# Altium PCB VGA2NTSC v11.PcbDoc
Units mil, origin at the board's own origin, x right, y up, seen from the top; angles counter-clockwise.
Board outline 2300 x 4000 mil, 2 copper layers (Top Layer, Bottom Layer), stack 62.8 mil thick; 49 components, 41 nets, 184 pads, 29 vias.
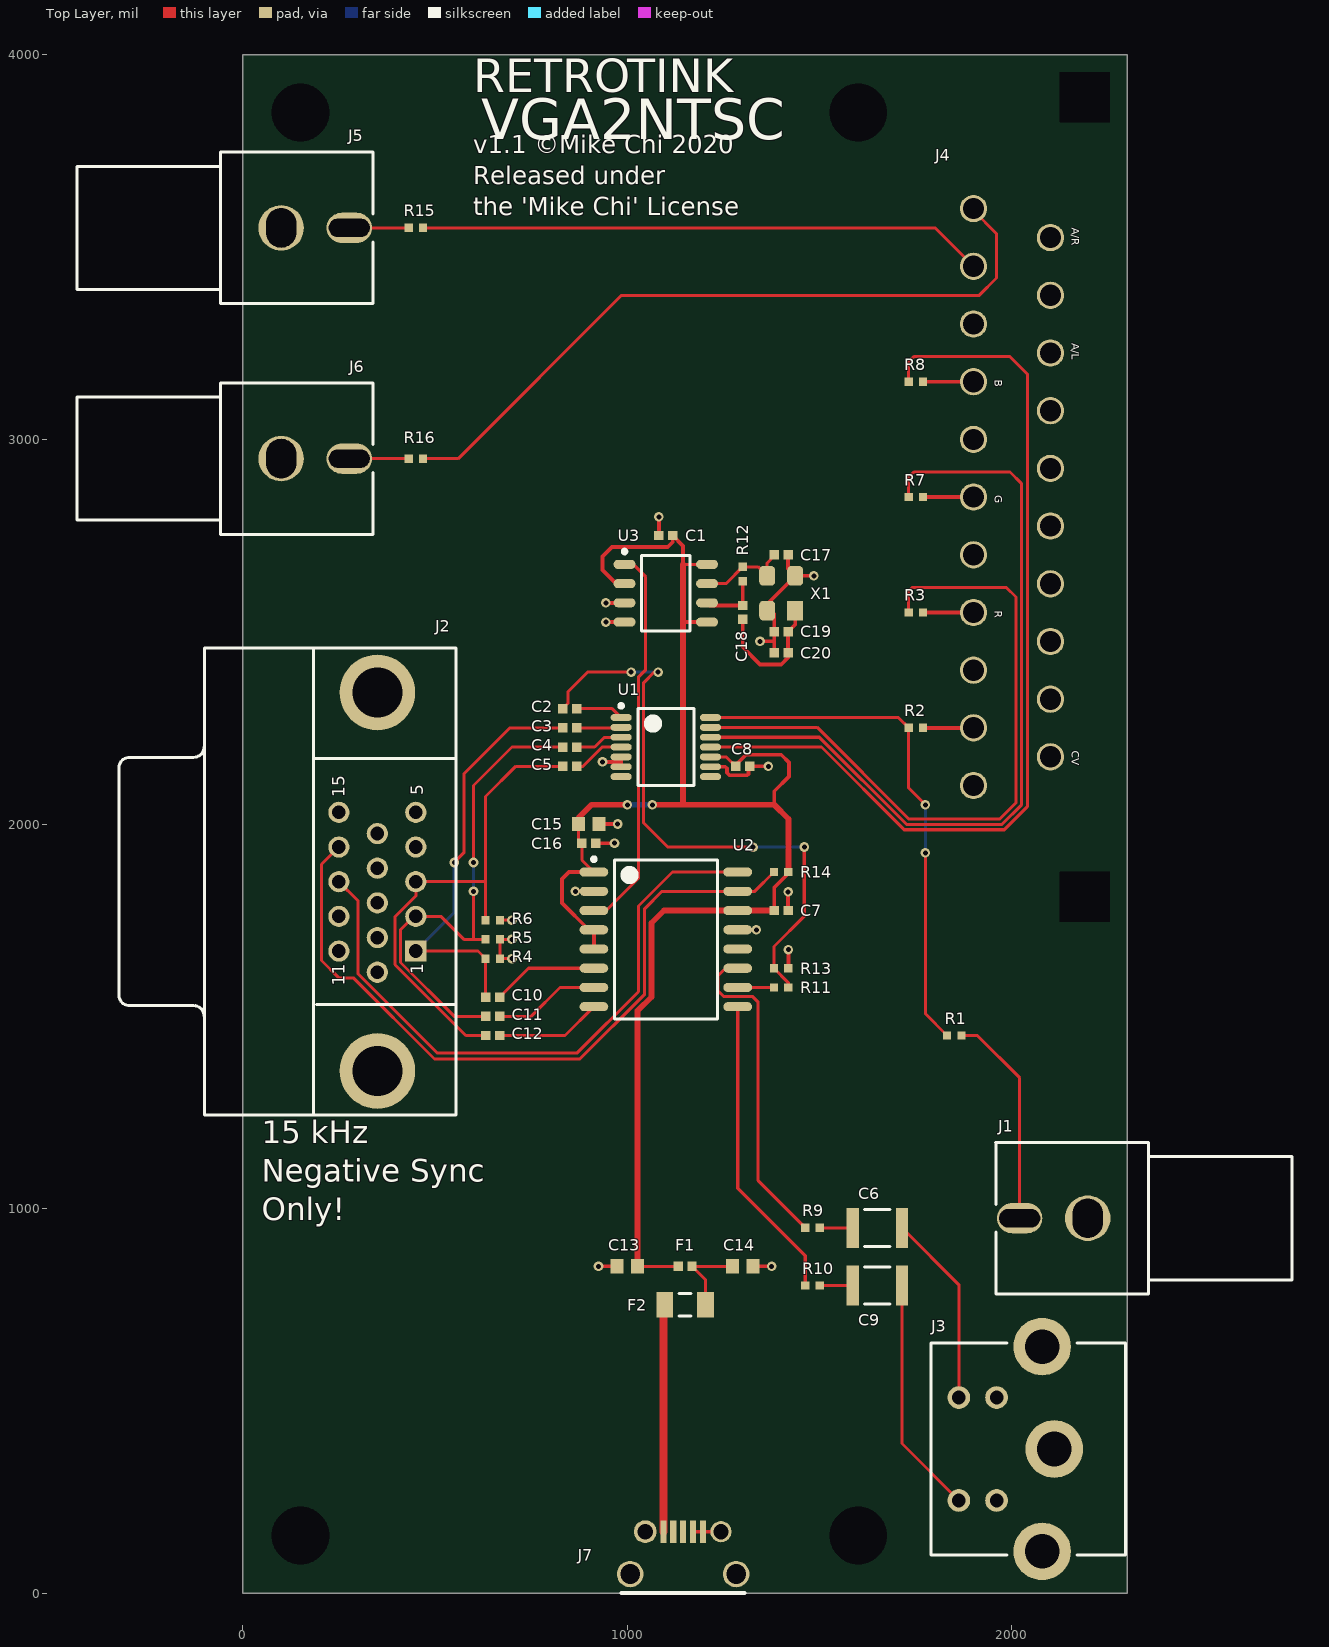
[diagram p0: Top Layer view]
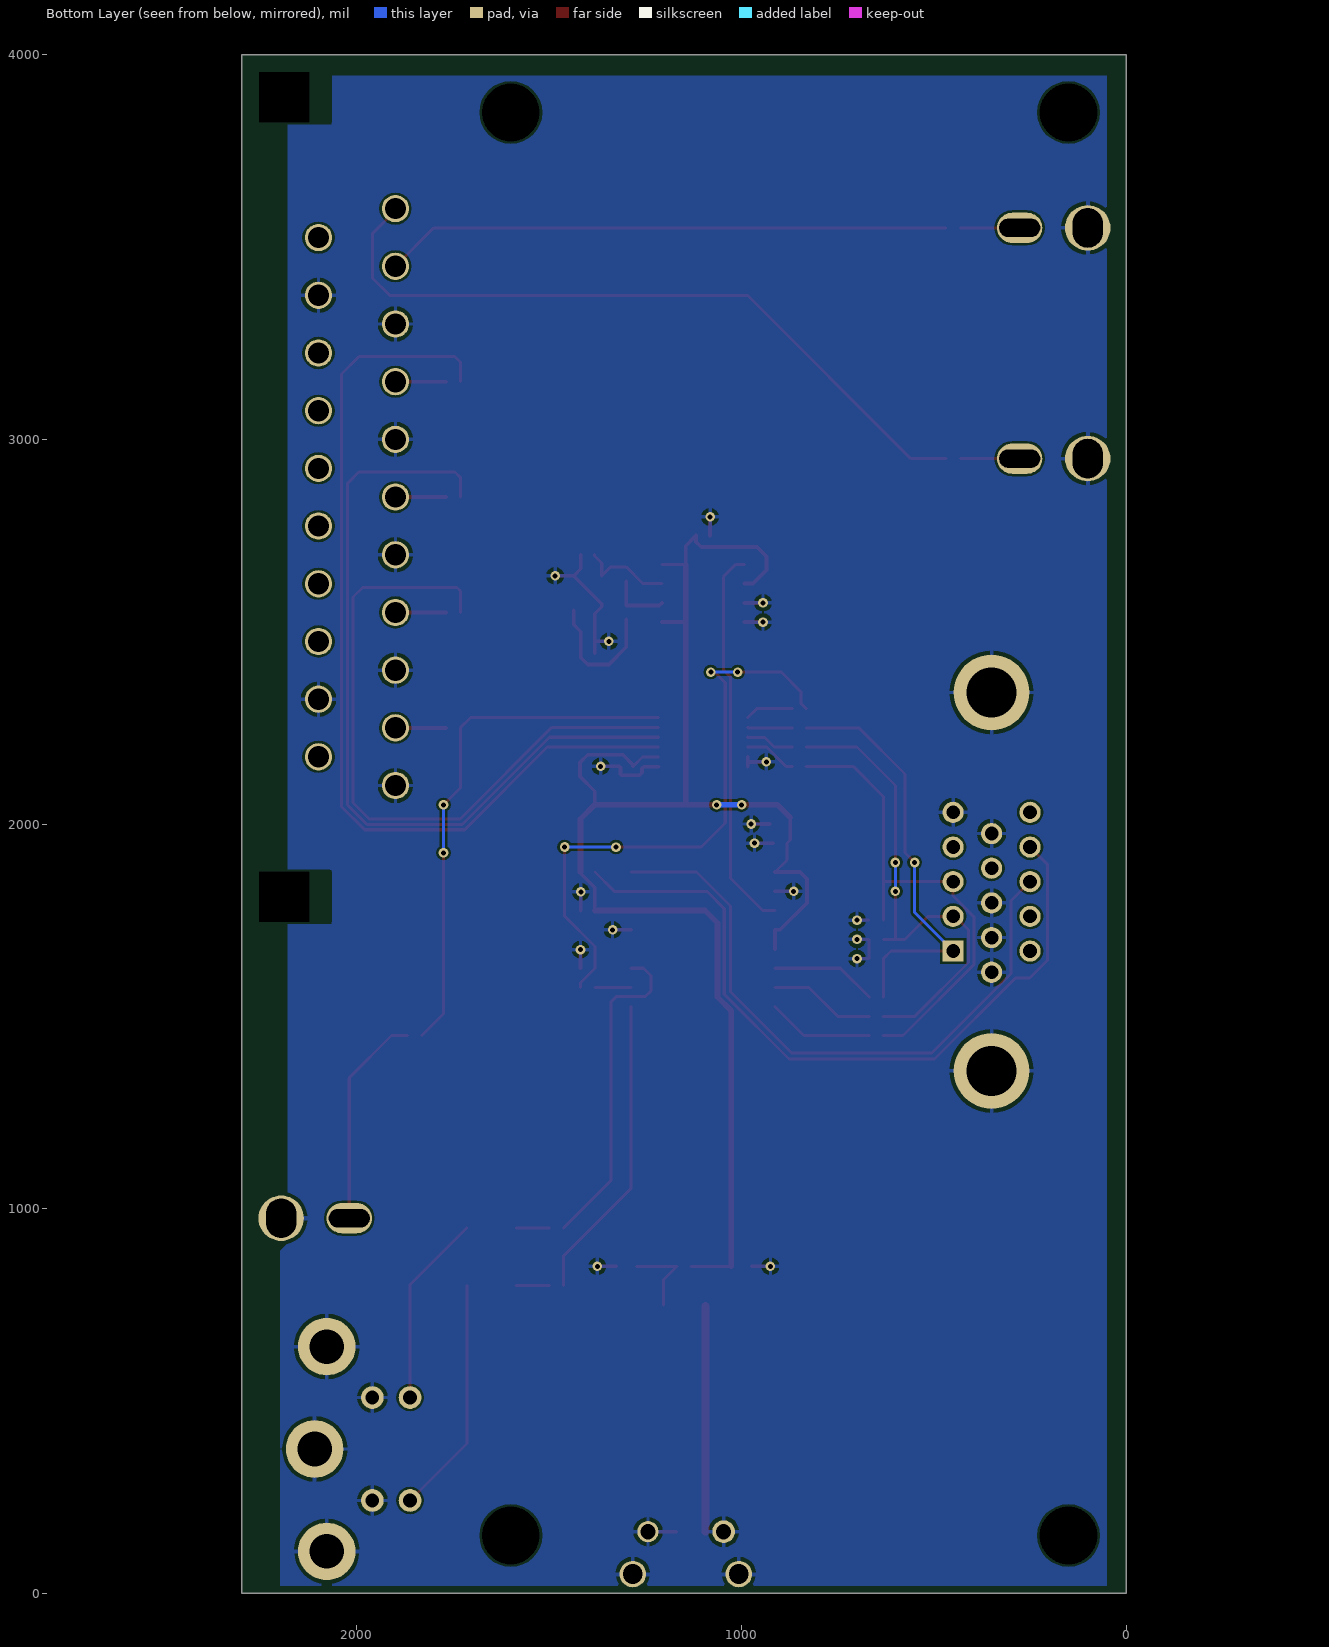
[diagram p1: Bottom Layer view, seen from below]
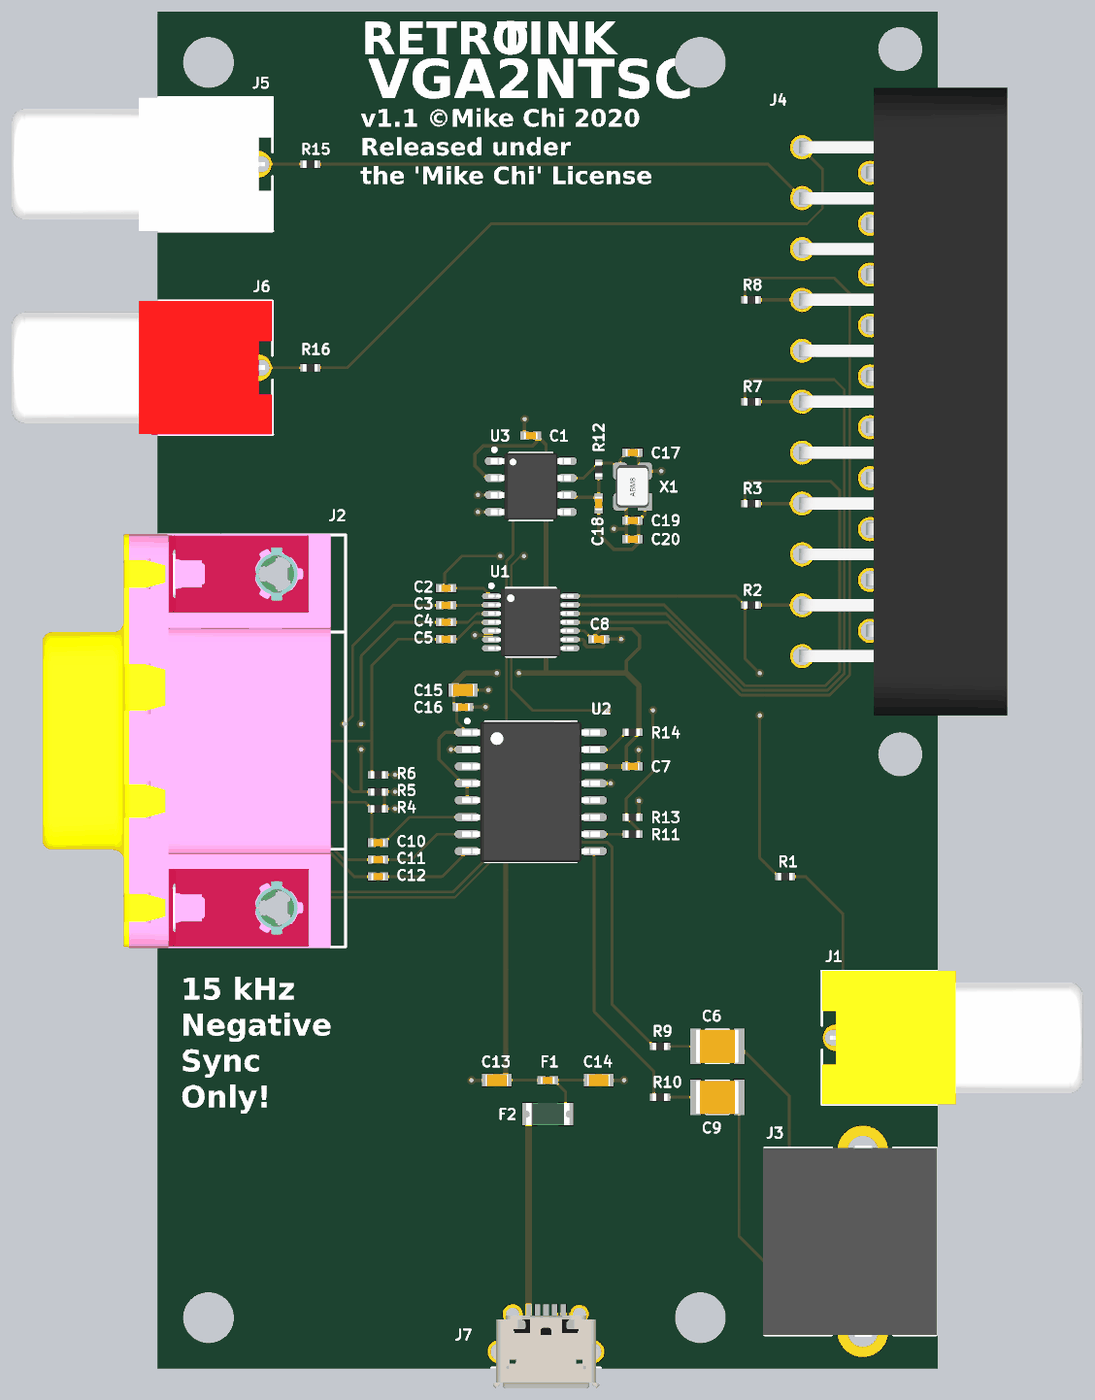
[diagram p2: 3D render of the assembled board from above, using the file's embedded part models]

## Layer stack, top to bottom
Top Solder: solder mask 0.4, Solder Resist, Dk 3.5
Top Layer: signal copper 1.4
Dielectric 1: dielectric 60, FR-4, Dk 4.8
Bottom Layer: signal copper 1.4
Bottom Solder: solder mask 0.4, Solder Resist, Dk 3.5

## Board outline
0,0 0,4000 2300,4000 2300,0

## Design rules (kind name [scope] priority, off if disabled: settings)
Clearance [All] p1: gap=6 ignorepadtopadclearanceinfootprint=FALSE
PlaneClearance [All] p1: clearance=15
PlaneConnect [All] p1: planeconnectstyle=Relief reliefexpansion=10 reliefentries=4 reliefconductorwidth=10 reliefairgap=6
PolygonConnect [All] p1: connectstyle=Relief reliefconductorwidth=10 reliefentries=4 polygonreliefangle="90 Angle" airgapwidth=10
RoutingVias [All] p1: holewidth=13 width=25 viastyle="Through Hole" minholewidth=13 minwidth=25 maxholewidth=13 maxwidth=25
SolderMaskExpansion [All] p1: expansion=2
Width [All] p1: maxlimit=20 minlimit=6 preferedwidth=6
28 further rules are at their usual default settings.

## Components (designator, comment, footprint, x,y, rotation, side; value= is the part's Value field where it differs from the comment)
C1 "Cap 0.1uF 0402" CAPC1005X05N 1100,2750 r0 top value=0.1uF
C2 "Cap 0.1uF 0402" CAPC1005X05N 850,2300 r0 top value=0.1uF
C3 "Cap 0.1uF 0402" CAPC1005X05N 850,2250 r0 top value=0.1uF
C4 "Cap 0.1uF 0402" CAPC1005X05N 850,2200 r0 top value=0.1uF
C5 "Cap 0.1uF 0402" CAPC1005X05N 850,2150 r0 top value=0.1uF
C6 "Cap 100uF 1210" CAPC3225X25N 1650,950 r0 top value=100uF
C7 "Cap 0.1uF 0402" CAPC1005X05N 1400,1775 r180 top value=0.1uF
C8 "Cap 0.1uF 0402" CAPC1005X05N 1300,2150 r180 top value=0.1uF
C9 "Cap 100uF 1210" CAPC3225X25N 1650,800 r0 top value=100uF
C10 "Cap 0.1uF 0402" CAPC1005X05N 650,1550 r0 top value=0.1uF
C11 "Cap 0.1uF 0402" CAPC1005X05N 650,1500 r0 top value=0.1uF
C12 "Cap 0.1uF 0402" CAPC1005X05N 650,1450 r0 top value=0.1uF
C13 "Cap 10uF 0603" CAPC1608X09N 1000,850 r180 top value=10uF
C14 "Cap 10uF 0603" CAPC1608X09N 1300,850 r0 top value=10uF
C15 "Cap 10uF 0603" CAPC1608X09N 900,2000 r0 top value=10uF
C16 "Cap 0.1uF 0402" CAPC1005X05N 900,1950 r180 top value=0.1uF
C17 "Cap 18pF 0402" CAPC1005X05N 1400,2700 r180 top value=18pF
C18 "Cap 47pF 0402" CAPC1005X05N 1300,2550 r270 top value=47pF
C19 "Cap 47pF 0402" CAPC1005X05N 1400,2500 r0 top value=47pF
C20 "Cap 47pF 0402" CAPC1005X05N 1400,2445 r0 top value=47pF
F1 "Ferrite Bead" CAPC1005X05N 1150,850 r0 top
F2 "PTC 500mA" PTC1206 1150,750 r180 top
J1 "RCA Yellow" RCJ-044 2197.01,975 r0 top
J2 "DB-15 VGA" "DB-15 VGA" 350,1850 r90 top
J3 "MD-40SM" CDIN2.6-3H4A 2295.04,375 r180 top
J4 "SCART Female" "SCART FEMALE" 1900,2850 r270 top
J5 "RCA White" RCJ-043 100,3550 r180 top
J6 "RCA Red" RCJ-042 100,2950 r180 top
J7 "Micro USB" MICROUSB 1145,189.53 r90 top
R1 "Res 75 0402" RESC1005X03N 1850,1450 r0 top value=75
R2 "Res 75 0402" RESC1005X03N 1750,2250 r0 top value=75
R3 "Res 75 0402" RESC1005X03N 1750,2550 r0 top value=75
R4 "Res 75 0402" RESC1005X03N 650,1650 r0 top value=75
R5 "Res 75 0402" RESC1005X03N 650,1700 r0 top value=75
R6 "Res 75 0402" RESC1005X03N 650,1750 r0 top value=75
R7 "Res 75 0402" RESC1005X03N 1750,2850 r0 top value=75
R8 "Res 75 0402" RESC1005X03N 1750,3150 r0 top value=75
R9 "Res 75 0402" RESC1005X03N 1481.3,950 r0 top value=75
R10 "Res 75 0402" RESC1005X03N 1481.3,800 r0 top value=75
R11 "Res 1k 0402" RESC1005X03N 1400,1575 r0 top value=1k
R12 "Res 1M 0402" RESC1005X03N 1300,2650 r270 top value=1M
R13 "Res 1k 0402" RESC1005X03N 1400,1625 r0 top value=1k
R14 "Res 4.7k" RESC1005X03N 1400,1875 r180 top value=4.7k
R15 "Res 49.9 0402" RESC1005X03N 450,3550 r180 top value=49.9
R16 "Res 49.9 0402" RESC1005X03N 450,2950 r180 top value=49.9
U1 "Video Buffer" TSOP65P640X120-14N 1100,2200 r0 top
U2 "Encoder" SOIC127P1030X237-16N 1100,1700 r0 top
U3 "OSC/DIV" SOIC127P600X175_HS-8N 1100,2600 r0 top
X1 "XTAL" ABM8-28.63636MHZ-B2-T 1400,2600 r90 top

## Footprints (in the part's own frame and the unit in brackets; to place one, negate y for a bottom-side part, rotate by r counter-clockwise, add the part's x,y. Pads: shape width x height; smd on the part's side, far side on the other; paste and mask are expansions set on the pad)
ABM8-28.63636MHZ-B2-T [mm] "ABM8-28.63636MHZ-B2-T"
  rect 1.3x1.05 smd: 1(-1.15,-0.925)
  rrect50% 1.3x1.05 smd: 2(1.15,-0.925) 3(1.15,0.925) 4(-1.15,0.925)
  body extent -1.6,-1.24 1.6,1.24, height 0.8
CAPC1005X05N [mm] "Chip Capacitor, 2-Leads, Body 1.00x0.50mm, IPC Medium Density"
  rect 0.62x0.62 smd: 1(-0.46,0) 2(0.46,0)
  body extent -0.53,-0.28 0.53,0.28, height 0.5
CAPC1608X09N [mm] "Chip Capacitor, 2-Leads, Body 1.60x0.80mm, IPC Medium Density"
  rect 0.85x0.95 smd: 1(-0.675,0) 2(0.675,0)
  body extent -0.85,-0.45 0.85,0.45, height 0.9
CAPC3225X25N [mm] "Chip Capacitor, 2-Leads, Body 3.20x2.50mm, IPC Medium Density"
  rect 0.8x2.65 smd: 1(-1.625,0) 2(1.625,0)
  silkscreen extent -0.85,-1.22 0.85,1.23, body extent -1.6,-1.25 1.6,1.25, height 2.5
CDIN2.6-3H4A [mm] "Connector; Circular DIN, Thru-Hole; 4 Position; Right Angle; Pitch 2.1/2.6 mm; Body 14 x 12.84 x 13 mm (WxTxH), Shielded, Special PCB Retention"
  round 1.5 hole 0.9: 1(8.51,-3.4) 2(8.51,3.4) 3(11,-3.4) 4(11,3.4)
  round 3.8 hole 2.28: MH1(5.5,-6.76) MH2(4.7,0) MH3(5.5,6.76)
  silkscreen extent 0,-7 12.84,7, body extent -0.05,-7.17 12.95,7.17, height 12.8
"DB-15 VGA" [mm]
  rect 1.4x1.4 hole 0.9: 1(-4.58,-2.54)
  round 1.4 hole 0.9: 2(-2.29,-2.54) 3(0,-2.54) 4(2.29,-2.54) 5(4.58,-2.54) 6(-5.98,0) 7(-3.69,0) 8(-1.4,0) 9(0.89,0) 10(3.18,0) 11(-4.58,2.54) 12(-2.29,2.54) 13(0,2.54) 14(2.29,2.54) 15(4.58,2.54)
  round 5 hole 3.3: 16(-12.495,0) 17(12.495,0)
  silkscreen extent -15.41,-5.19 15.43,17.07, body extent -15.5,-4.06 15.5,17.52, height 12.55
MICROUSB [mm]
  rect 1.5x0.4 smd: 1(-0.75,1.3) 2(-0.75,0.65) 3(-0.75,0) 4(-0.75,-0.65) 5(-0.75,-1.3)
  round 1.5 hole 1: 6(-0.75,2.5)
  round 1.4 hole 1: 7(-0.75,-2.5)
  round 1.75 hole 1.3: 8(-3.55,3.5) 9(-3.55,-3.5)
  silkscreen extent -4.8,-4.06 -4.8,4.06, body extent -6.28,-3.99 -0.85,3.99, height 2.73
PTC1206 [mm] "1206 PTC Fuse"
  rect 1.1x1.7 smd: 1(-1.35,0) 2(1.35,0)
  silkscreen extent -0.4,-0.75 0.4,0.75, body extent -1.63,-0.82 1.63,0.82, height 0.82
RCJ-042 [mm] "RCA Red"
  round 3 hole 2 slot 2.6 at 90 deg: 1A(0,0)
  oval 3x2 hole 1.2 slot 2.7 at 0 deg: 2B(-4.496,0)
  silkscreen extent -6.07,-5 13.5,5, body extent -6.04,-5 13.46,5, height 11.5
RCJ-043 [mm] "RCA White"
  round 3 hole 2 slot 2.6 at 90 deg: 1A(0,0)
  oval 3x2 hole 1.2 slot 2.7 at 0 deg: 2B(-4.496,0)
  silkscreen extent -6.07,-5 13.5,5, body extent -6.04,-5 13.46,5, height 11.5
RCJ-044 [mm] "RCA Yellow"
  round 3 hole 2 slot 2.6 at 90 deg: 1A(0,0)
  oval 3x2 hole 1.2 slot 2.7 at 0 deg: 2B(-4.496,0)
  silkscreen extent -6.07,-5 13.5,5, body extent -6.04,-5 13.46,5, height 11.5
RESC1005X03N [mm] "Chip Resistor, 2-Leads, Body 1.00x0.50mm, IPC Medium Density"
  rect 0.55x0.55 smd: 1(-0.475,0) 2(0.475,0)
  body extent -0.55,-0.28 0.55,0.28, height 0.35
"SCART FEMALE" [mm]
  round 1.8 hole 1.4: 1(-19.05,0) 2(-17.135,5.08) 3(-15.24,0) 4(-13.325,5.08) 5(-11.43,0) 6(-9.515,5.08) 7(-7.62,0) 8(-5.705,5.08) 9(-3.81,0) 10(-1.895,5.08) 11(0,0) 12(1.915,5.08) 13(3.81,0) 14(5.725,5.08) 15(7.62,0) 16(9.535,5.08) 17(11.43,0) 18(13.345,5.08) 19(15.24,0) 20(17.155,5.08) 21(19.05,0)
  round 0 hole 3.3 square unplated: ""(-26.4,7.35) ""(26.4,7.35)
  body extent -23.5,-0.25 23.5,15.35, height 16.75
SOIC127P600X175_HS-8N [mm] "SOIC, 8-Leads, Body 4.90x3.90mm, Pitch 1.27mm, NO Pad 2.39x2.39mm, IPC Medium Density"
  oval 1.45x0.6 smd: 1(-2.725,1.905) 2(-2.725,0.635) 3(-2.725,-0.635) 4(-2.725,-1.905) 5(2.725,-1.905) 6(2.725,-0.635) 7(2.725,0.635) 8(2.725,1.905)
  silkscreen extent -2.85,-2.5 1.6,2.88, body extent -3,-2.5 3,2.5, height 1.75
SOIC127P1030X237-16N [mm] "SOIC, 16-Leads, Body 10.25x7.50mm, Pitch 1.27mm, IPC Medium Density"
  oval 1.9x0.6 smd: 1(-4.75,4.445) 2(-4.75,3.175) 3(-4.75,1.905) 4(-4.75,0.635) 5(-4.75,-0.635) 6(-4.75,-1.905) 7(-4.75,-3.175) 8(-4.75,-4.445) 9(4.75,-4.445) 10(4.75,-3.175) 11(4.75,-1.905) 12(4.75,-0.635) 13(4.75,0.635) 14(4.75,1.905) 15(4.75,3.175) 16(4.75,4.445)
  silkscreen extent -4.87,-5.25 3.4,5.42, body extent -5.16,-5.25 5.16,5.25, height 2.36
TSOP65P640X120-14N [mm] "TSOP, 14-Leads, Body 5.00x4.40mm, Pitch 0.65mm, IPC Medium Density"
  oval 1.4x0.45 smd: 1(-2.95,1.95) 2(-2.95,1.3) 3(-2.95,0.65) 4(-2.95,0) 5(-2.95,-0.65) 6(-2.95,-1.3) 7(-2.95,-1.95) 8(2.95,-1.95) 9(2.95,-1.3) 10(2.95,-0.65) 11(2.95,0) 12(2.95,0.65) 13(2.95,1.3) 14(2.95,1.95)
  silkscreen extent -3.07,-2.55 1.85,2.85, body extent -3.2,-2.55 3.2,2.55, height 1.2

## Part data
C1 C2 C3 C4 C5 C7 C8 C10 C11 C12 C16: "Capacitor", Dielectric=X7R, ManufacturerPartNumber=CL05B104JO5NNNC, Voltage=16V, DigiKey=1276-1505-1-ND
C6 C9: "Capacitor", Dielectric=X5R, ManufacturerPartNumber=GRM32ER61A107ME20L, Voltage=10V, DigiKey=490-9969-2-ND
C13 C14 C15: "Capacitor", Dielectric=X5R, ManufacturerPartNumber=GRM188R61A106KE69J, Voltage=10V, DigiKey=490-14372-2-ND
C17: "Capacitor", Dielectric=C0G, ManufacturerPartNumber=CL05C180JB5NNNC, Voltage=50V, DigiKey=1276-1140-1-ND
C18 C19 C20: library part "Cap 47pF", "Capacitor", Dielectric=C0G, ManufacturerPartNumber=C0402C470K5GACTU, Voltage=50V, DigiKey=399-7796-2-ND
F1: library part BLM15PX221SN1D, "Ferrite Bead 220 Ohm 100Mhz 100mOhm DC", DigiKey=490-11021-6-ND, ManufacturerPartNumber=BLM15PX221SN1D
F2: library part "PTC Fuse", "PTC Fuse 500mA", ManufacturerPartNumber=0ZCJ0050AF2E, DigiKey=507-1803-1-ND
J1: library part RCJ-044, "RCA Jack Yellow", DigiKey=CP-1421-ND, ManufacturerPartNumber=RCJ-044
J2: ManufacturerPartNumber=ICD15S13E4GX00LF, DigiKey=609-5181-ND
J3: "DIN-4 S-Video Jack", DigiKey=CP-2240-ND, ManufacturerPartNumber=MD-40SM
J4: library part SCART
J5: library part RCJ-043, "RCA Jack White", DigiKey=CP-1420-ND, ManufacturerPartNumber=RCJ-043
J6: library part RCJ-042, "RCA Jack Red", DigiKey=CP-1419-ND, ManufacturerPartNumber=RCJ-042
J7: library part MICROUSB, ManufacturerPartNumber=10118194-0001LF, DigiKey=609-4618-1-ND
R1 R2 R3 R4 R5 R6 R7 R8 R9 R10: "Resistor 75 0402", ManufacturerPartNumber=RC0402FR-0775RL, Tolerance=1%, DigiKey=311-75.0LRTR-ND
R11 R13: "Resistor 1k 0402", ManufacturerPartNumber=RC1005F102CS, Tolerance=1%, DigiKey=1276-3430-1-ND
R12: "Resistor 1M 0402", ManufacturerPartNumber=RC1005F105CS, Tolerance=1%, DigiKey=1276-3433-1-ND
R14: library part "Res 4.7k 0402", "Resistor 4.7k 0402", ManufacturerPartNumber=RCS1005J472CS, Tolerance=5%, DigiKey=1276-7028-1-ND
R15 R16: "Resistor 49.9 0402", ManufacturerPartNumber=RC1005F49R9CS, Tolerance=1%, DigiKey=1276-3469-1-ND
U1: library part TSH7373, ManufacturerPartNumber=THS7373IPWR, DigiKey=296-25626-2-ND
U2: library part AD725ARZ, "RGB to Video Encoder", DigiKey=AD725ARZ-ND, ManufacturerPartNumber=AD725ARZ
U3: library part 74HC6323AD, "Counter + Oscillator", DigiKey=1727-3330-ND, MFG=74HC6323AD,112
X1: library part ABM8-28.63636MHZ-B2-T, "CRYSTAL 28.63636MHZ 18PF SMD", DigiKey=535-9143-2-ND, ManufacturerPartNumber=ABM8-28.63636MHZ-B2-T

## Free pads (board coordinates)
  round 60 hole 150 unplated: ""(150,150) ""(150,3850) ""(1600,150) ""(1600,3850)

## Via types
v1: diameter 25, hole 13, Top Layer to Bottom Layer, tented both sides, 29 vias

## Nets (pads, with @x,y where several pads share a name; then routed paths per layer and width w, separated by ;. In a path a pad name is that pad's centre, name@x,y a point inside that pad or via, vN(x,y) a via of type N, cw(c..) or ccw(c..) an arc to the next point about the centre after c; other vN are vias at no path point)
BIN: C5.1 C12.1 J2.3 R6.1 | length 1286.1
  Top Layer w8: R6.1 631.3,1850 ; C12.1 580.2,1450 396,1634.2 396,1758.96 450,1812.96 J2.3 631.3,1850 ; C5.1 710,2150 631.3,2071.3 631.3,1850
BOUT: J4.7 R8.2 | length 131.3
  Top Layer w10: R8.2 J4.7
CHROMA_OUT: C9.2 J3.4 | length 620.2
  Top Layer w8: C9.2 1713.98,389.13 J3.4
CLOCK: U2.3 U3.1 | length 1010.2
  Top Layer w8: U2.3 945,1775 1028.5,1858.5 1028.5,2381.68 1047.5,2400.68 1047.5,2642.5 1015,2675 U3.1
CSYNC_OUT: J4.19 R2.2 | length 131.3
  Top Layer w10: R2.2 J4.19
CVBS_OUT: J1.2B R1.2 | length 561.9
  Top Layer w8: R1.2 1910,1450 2020,1340 J1.2B
GIN: C4.1 C11.1 J2.2 R5.1 | length 1298.7
  Top Layer w8: v1(600,1825) 600,1700 ; v1(600,1900) 600,2100 700,2200 C4.1 ; R5.1 600,1700 ; C11.1 550,1500 410,1640 410,1725 444.84,1759.84 J2.2 515.16,1759.84 575,1700 600,1700
  Bottom Layer w8: v1(600,1825) v1(600,1900)
GND: C1.1 C7.1 C8.1 C13.2 C14.2 C15.2 C16.1 C17.1 C19.1 C20.1 J1.1A J2.5 J2.6 J2.7 J2.8 J2.10 J2.16 J2.17 J3.1 J3.2 J3.MH1 J3.MH2 J3.MH3 J4.4 J4.5 J4.9 J4.13 J4.17 J4.18 J4.21 J5.1A J6.1A J7.4 J7.5 J7.6 J7.7 J7.8 J7.9 R4.2 R5.2 R6.2 R13.2 U1.5 U1.6 U1.9 U2.2 U2.13 U3.3 U3.4 X1.2 X1.4 | length 1394.7
  Top Layer w8: R6.2 v1(700,1750) ; v1(700,1650) R4.2 R5.2 v1(700,1700)
  Top Layer w10: v1(864.57,1825) U2.2 ; C16.1 v1(966.54,1950) ; v1(925,850) C13.2 ; C15.2 v1(975,2000) ; v1(935.43,2161.61) 983.86,2161.61 ; v1(944.29,2525) U3.4 ; v1(944.29,2575) U3.3 ; U1.6 U1.5 ; C1.1 v1(1081.89,2798.43) ; J7.4 J7.5 J7.7 ; U1.9 1254.44,2148.82 1258.69,2144.57 1258.69,2133.24 1265.13,2126.8 1311.8,2126.8 1315,2130 1315,2146.89 C8.1 v1(1366.54,2150) ; U2.13 v1(1335.43,1725) ; C14.2 v1(1375,850) ; v1(1345,2475) 1381.89,2475 ; C20.1 1381.89,2475 ; C7.1 v1(1418.11,1823.43) ; C17.1 1418.11,2663.58 X1.2 ; R13.2 v1(1418.7,1673.43) ; v1(1484.84,2645.28) X1.2 ; 1381.89,2475 C19.1 1381.89,2546.69 1363.58,2565 1363.58,2572.44 X1.2
GOUT: J4.11 R7.2 | length 131.3
  Top Layer w10: R7.2 J4.11
HS: J2.13 U2.16 | length 1662.7
  Top Layer w8: J2.13 300,1800 300,1610.04 505.04,1405 870,1405 1029,1564 1029,1786.63 1117.37,1875 U2.16
  Bottom Layer w10: J2.13 J2.13@255,1850
LUMA_OUT: C6.2 J3.3 | length 502.4
  Top Layer w8: C6.2 1861.97,802.01 J3.3
NetC2_1: C2.1 R11.2 R13.1 | length 1575.7
  Top Layer w8: C2.1 845.91,2314.02 845.91,2344.08 896.82,2395 v1(1010,2395) ; v1(1080,2395) 1070,2395 1042.5,2367.5 1042.5,2002.5 1105,1940 v1(1326.65,1940) ; R11.2 1418.7,1587.6 R13.1 1381.3,1681.3 1460,1760 v1(1460,1940.16)
  Bottom Layer w8: v1(1010,2395) v1(1080,2395) ; v1(1326.65,1940) 1326.81,1940.16 v1(1460,1940.16)
NetC2_2: C2.2 U1.1 | length 125.4
  Top Layer w8: C2.2 960.63,2300 U1.1
NetC3_2: C3.2 U1.2 | length 116.2
  Top Layer w8: C3.2 982.68,2250 U1.2
NetC4_2: C4.2 U1.3 | length 126.3
  Top Layer w8: C4.2 915,2200 940,2225 983.27,2225 U1.3
NetC5_2: C5.2 U1.4 | length 136.5
  Top Layer w8: C5.2 884.8,2150 934.8,2200 U1.4
NetC6_1: C6.1 R9.2 | length 86
  Top Layer w8: R9.2 C6.1
NetC9_1: C9.1 R10.2 | length 86
  Top Layer w8: R10.2 C9.1
NetC10_2: C10.2 U2.6 | length 275.9
  Top Layer w8: C10.2 743.11,1625 U2.6
NetC11_2: C11.2 U2.7 | length 275.9
  Top Layer w8: C11.2 750,1500 825,1575 U2.7
NetC12_2: C12.2 U2.8 | length 275.9
  Top Layer w8: C12.2 837.99,1450 U2.8
NetC14_1: C14.1 F1.2 F2.1 | length 219.8
  Top Layer w8: F2.1 1203.15,814.96 F1.2 C14.1
NetC17_2: C17.2 R12.1 U3.7 X1.3 | length 246.4
  Top Layer w8: U3.7 1256.3,2625 R12.1 1340.16,2668.7 X1.3 1363.58,2678.58 1381.89,2696.89 C17.2
NetC18_1: C18.1 R12.2 U3.6 | length 158.8
  Top Layer w10: U3.6 1214.17,2568.11 C18.1 R12.2
NetC18_2: C18.2 C19.2 C20.2 X1.1 | length 345.3
  Top Layer w10: C18.2 1300,2530 1300,2460 1345,2415 1400,2415 1418.11,2433.11 C20.2 1418.11,2493.11 C19.2 1436.42,2518.31 X1.1
NetF2_2: F2.2 J7.1 | length 594
  Top Layer w8: F2.2@1093.82,746.97 F2.2 F2.2@1098.82,748.03
  Top Layer w20: J7.1 F2.2@1093.82,746.97
NetJ4_1: J4.1 R16.1 | length 1891.1
  Top Layer w8: R16.1 560,2950 984.61,3374.61 1915,3374.61 1960,3419.61 1960,3535 1900,3595 J4.1
NetJ4_3: J4.3 R15.1 | length 1472.7
  Top Layer w8: R15.1 1800,3550 J4.3
NetJ5_2B: J5.2B R15.2 | length 154.3
  Top Layer w8: J5.2B R15.2
NetJ6_2B: J6.2B R16.2 | length 154.3
  Top Layer w8: J6.2B R16.2
NetR1_1: R1.1 R2.1 U1.14 | length 1367.7
  Top Layer w8: U1.14 1704.53,2276.77 R2.1 1731.3,2093.7 v1(1775,2050) ; v1(1775,1925) 1775,1506.3 R1.1
  Bottom Layer w8: v1(1775,1925) v1(1775,2050)
NetR3_1: R3.1 U1.13 | length 1794.5
  Top Layer w8: U1.13 1493.42,2251.18 1731.6,2013 1968.4,2013 2010.3,2054.9 2010.3,2590 1985.3,2615 1740,2615 1731.3,2606.3 R3.1
NetR7_1: R7.1 U1.12 | length 2121.5
  Top Layer w8: U1.12 1499.21,2225.59 1725.8,1999 1974.2,1999 2024.3,2049.1 2024.3,2885.7 1995,2915 1745,2915 1731.3,2901.3 R7.1
NetR8_1: R8.1 U1.11 | length 2447.1
  Top Layer w8: U1.11 1505,2200 1720,1985 1980,1985 2040,2045 2040,3170 1995,3215 1745,3215 1731.3,3201.3 R8.1
NetR9_1: R9.1 U2.11 | length 853.4
  Top Layer w8: U2.11 1255,1625 1235,1605 1235,1566.81 1250,1551.81 1324.76,1551.81 1340,1536.57 1340,1072.6 R9.1
NetR10_1: R10.1 U2.9 | length 797.7
  Top Layer w8: U2.9 1287.01,1052.99 1462.6,877.4 R10.1
NetR11_1: R11.1 U2.10 | length 94.3
  Top Layer w8: U2.10 R11.1
RIN: C3.1 C10.1 J2.1 R4.1 | length 1108.4
  Top Layer w8: J2.1 611.61,1669.68 R4.1 631.3,1550.59 C10.1 ; v1(550,1900) 575,1925 575,2130 695,2250 C3.1
  Bottom Layer w8: J2.1 550,1769.68 v1(550,1900)
ROUT: J4.15 R3.2 | length 131.3
  Top Layer w10: R3.2 J4.15
VCC: C1.2 C7.2 C8.2 C13.1 C15.1 C16.2 F1.1 R14.1 U1.10 U2.1 U2.4 U2.5 U2.14 U3.2 U3.5 U3.8 | length 4166.4
  Top Layer w8: C15.1 873.43,1958.46 C16.2 881.89,1906.1 U2.1 ; C13.1 F1.1 ; 1145,2675 U3.8 ; U1.10 1257.48,2174.41 C8.2
  Top Layer w10: C15.1 C15.1@873.43,2016.6 ; U2.5 U2.4 899.8,1725 830,1794.8 830,1856.61 848.39,1875 U2.1 ; U3.2 970.43,2625 935.43,2660 935.43,2695.43 960,2720 1105,2720 1118.11,2733.11 C1.2 1145,2723.11 1145,2675 ; 1145,2525 U3.5 ; C8.2 1281.89,2153.75 1308.14,2180 1400,2180 1420,2160 1420,2123.23 1381.89,2085.12 1381.89,2050 ; C7.2 1381.89,1835.2 1418.7,1872.01 R14.1
  Top Layer w15: C15.1@873.43,2016.6 906.82,2050 v1(1000,2050) ; C13.1 1026.57,1514.2 1062.5,1550.12 1062.5,1742.5 1095,1775 U2.14 C7.2 ; v1(1065,2050) 1145,2050 ; 1145,2675 1145,2525 1145,2050 ; R14.1 1418.7,2013.19 1381.89,2050 1145,2050
  Bottom Layer w15: v1(1000,2050) v1(1065,2050)
VS: J2.14 R14.2 U2.15 | length 1927.9
  Top Layer w8: J2.14 205,1895.16 205,1645 250,1600 287.41,1600 498.41,1389 876.63,1389 1045,1557.37 1045,1780 1090,1825 U2.15 1331.3,1825 R14.2
pads on no net: J2.4 J2.9 J2.11 J2.12 J2.15 J4. J4.2 J4.6 J4.8 J4.10 J4.12 J4.14 J4.16 J4.20 J7.2 J7.3 U1.7 U1.8 U2.12

## Polygon pours and split planes (outlines as drawn)
GND on Bottom Layer "Bottom Layer-GND" (solid, pour order 0): 50,20 2200,20 2200,890 2180,910 2180,3945 50,3945

## Silkscreen, mask and mechanical layers (free items; w line width, h text height)
Top Overlay:
  text "RETRO" at 600,3874.41 h150
  text "TINK" at 1000,3874.41 h150
  text "VGA2NTSC" at 620,3745 h180
  text "v1.1 ©Mike Chi 2020 / Released under  / the 'Mike Chi' License" at 600,3567.72 h80
  text "15 kHz / Negative Sync / Only!" at 50,950 h100
Mechanical 1:
  the board outline again, w10

## Text inside footprints (layer, text, board x,y; h text height)
J1: Mechanical 1 "PCB Edge" at 2282.01,795 h9.84 r90
J2: Top Overlay "1" at 470,1609.68 h32 r90; Top Overlay "15" at 265,2069.68 h32 r90; Top Overlay "5" at 470,2074.68 h32 r90; Top Overlay "11" at 265,1579.68 h32 r90
J3: Mechanical 1 "PCB Edge" at 2271.42,638.78 h9.84 r270
J4: Top Overlay "CV" at 2155,2190 h20 r270; Top Overlay "A/L" at 2155,3250 h20 r270; Top Overlay "A/R" at 2155,3550 h20 r270; Top Overlay "B" at 1955,3155 h20 r270; Top Overlay "R" at 1955,2555 h20 r270; Top Overlay "G" at 1955,2855 h20 r270
J5: Mechanical 1 "PCB Edge" at 15,3730 h9.84 r270
J6: Mechanical 1 "PCB Edge" at 15,3130 h9.84 r270